# Altium PCB UPCNSL-ABS-PVC-2B.PcbDoc
Units mm, origin at the board's own origin, x right, y up, seen from the top; angles counter-clockwise.
Board outline 82 x 98.4 mm, 2 copper layers (Top Layer, Bottom Layer), stack 0.325 mm thick; 59 components, 56 nets, 164 pads, 60 vias.
Unrouted connection lines stored in the file: 6.
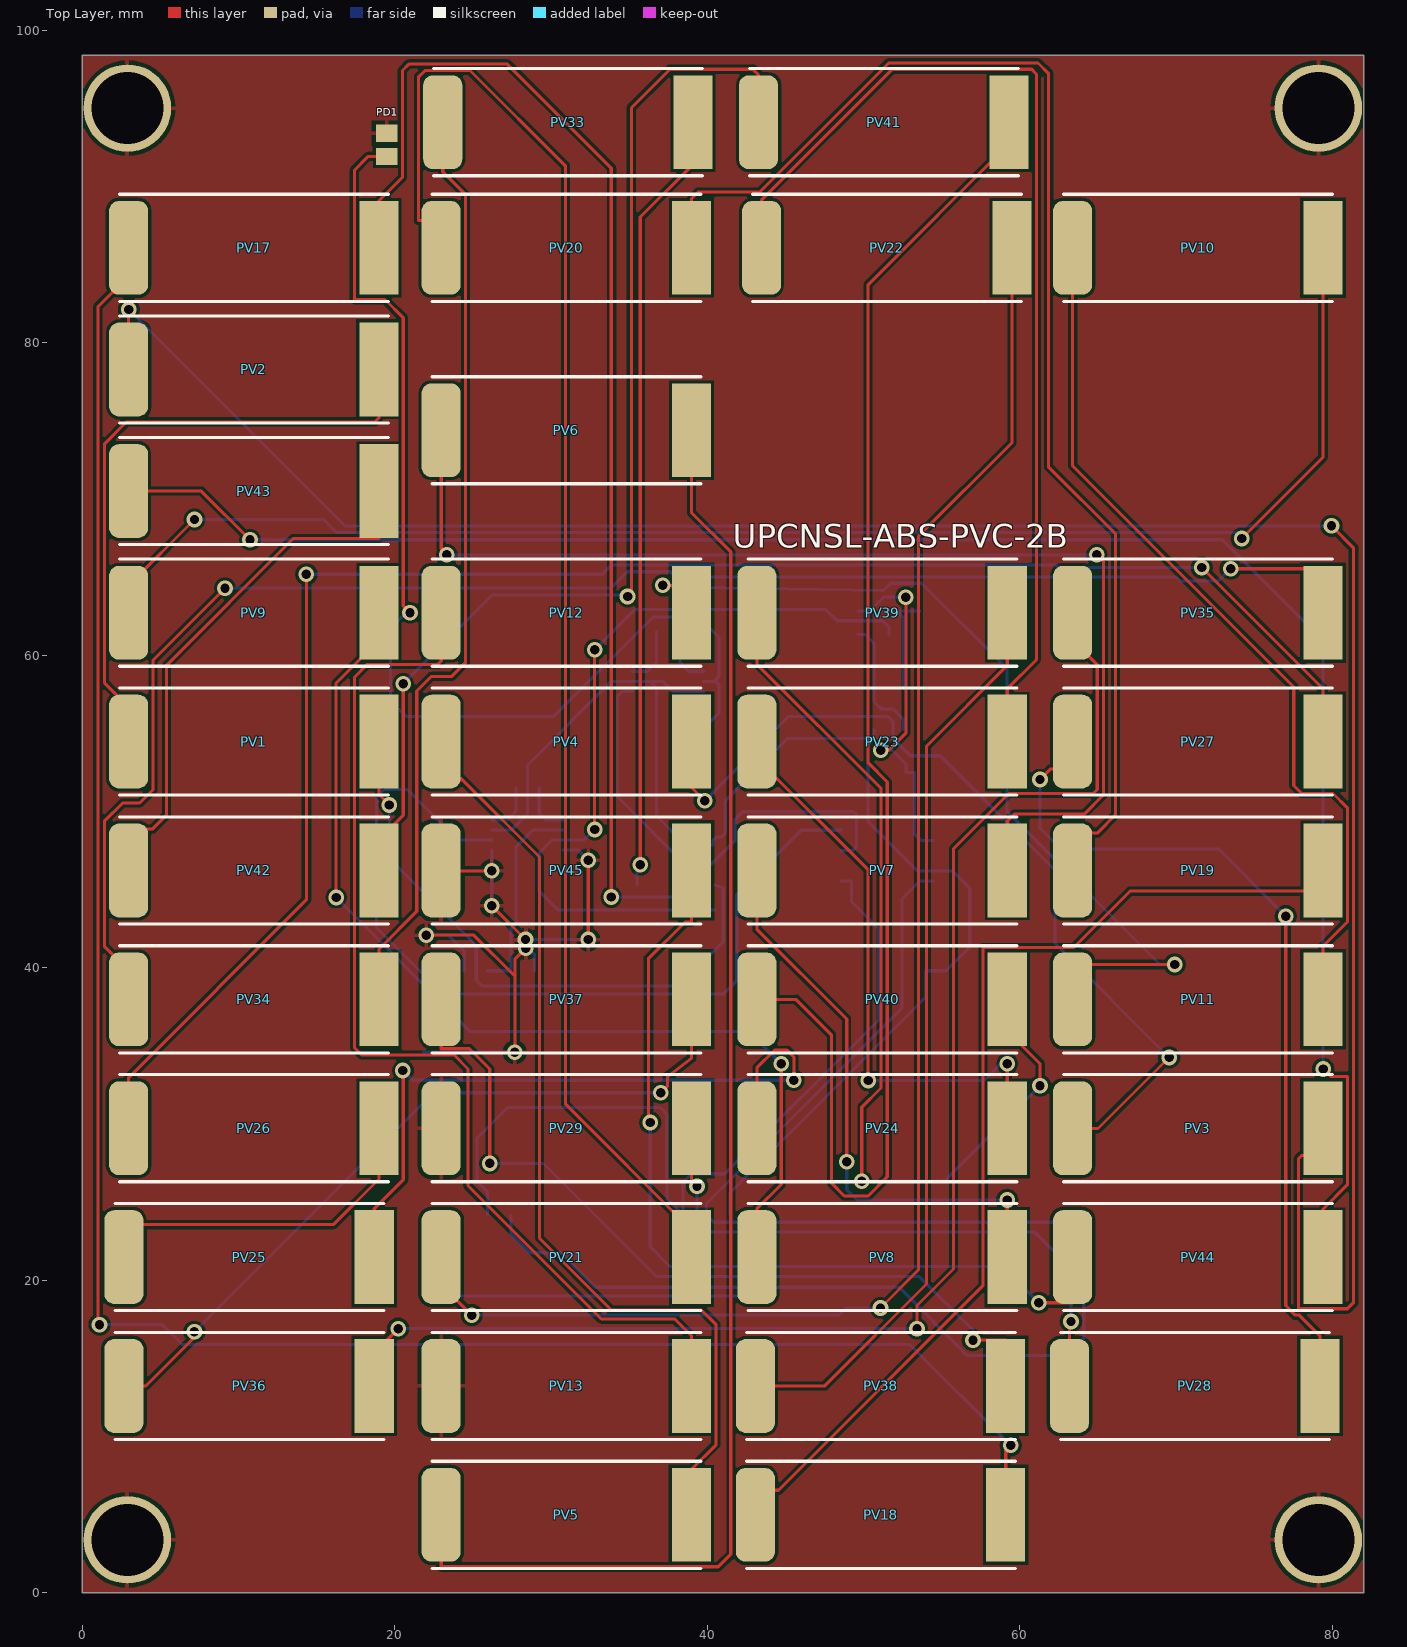
[diagram p0: Top Layer view]
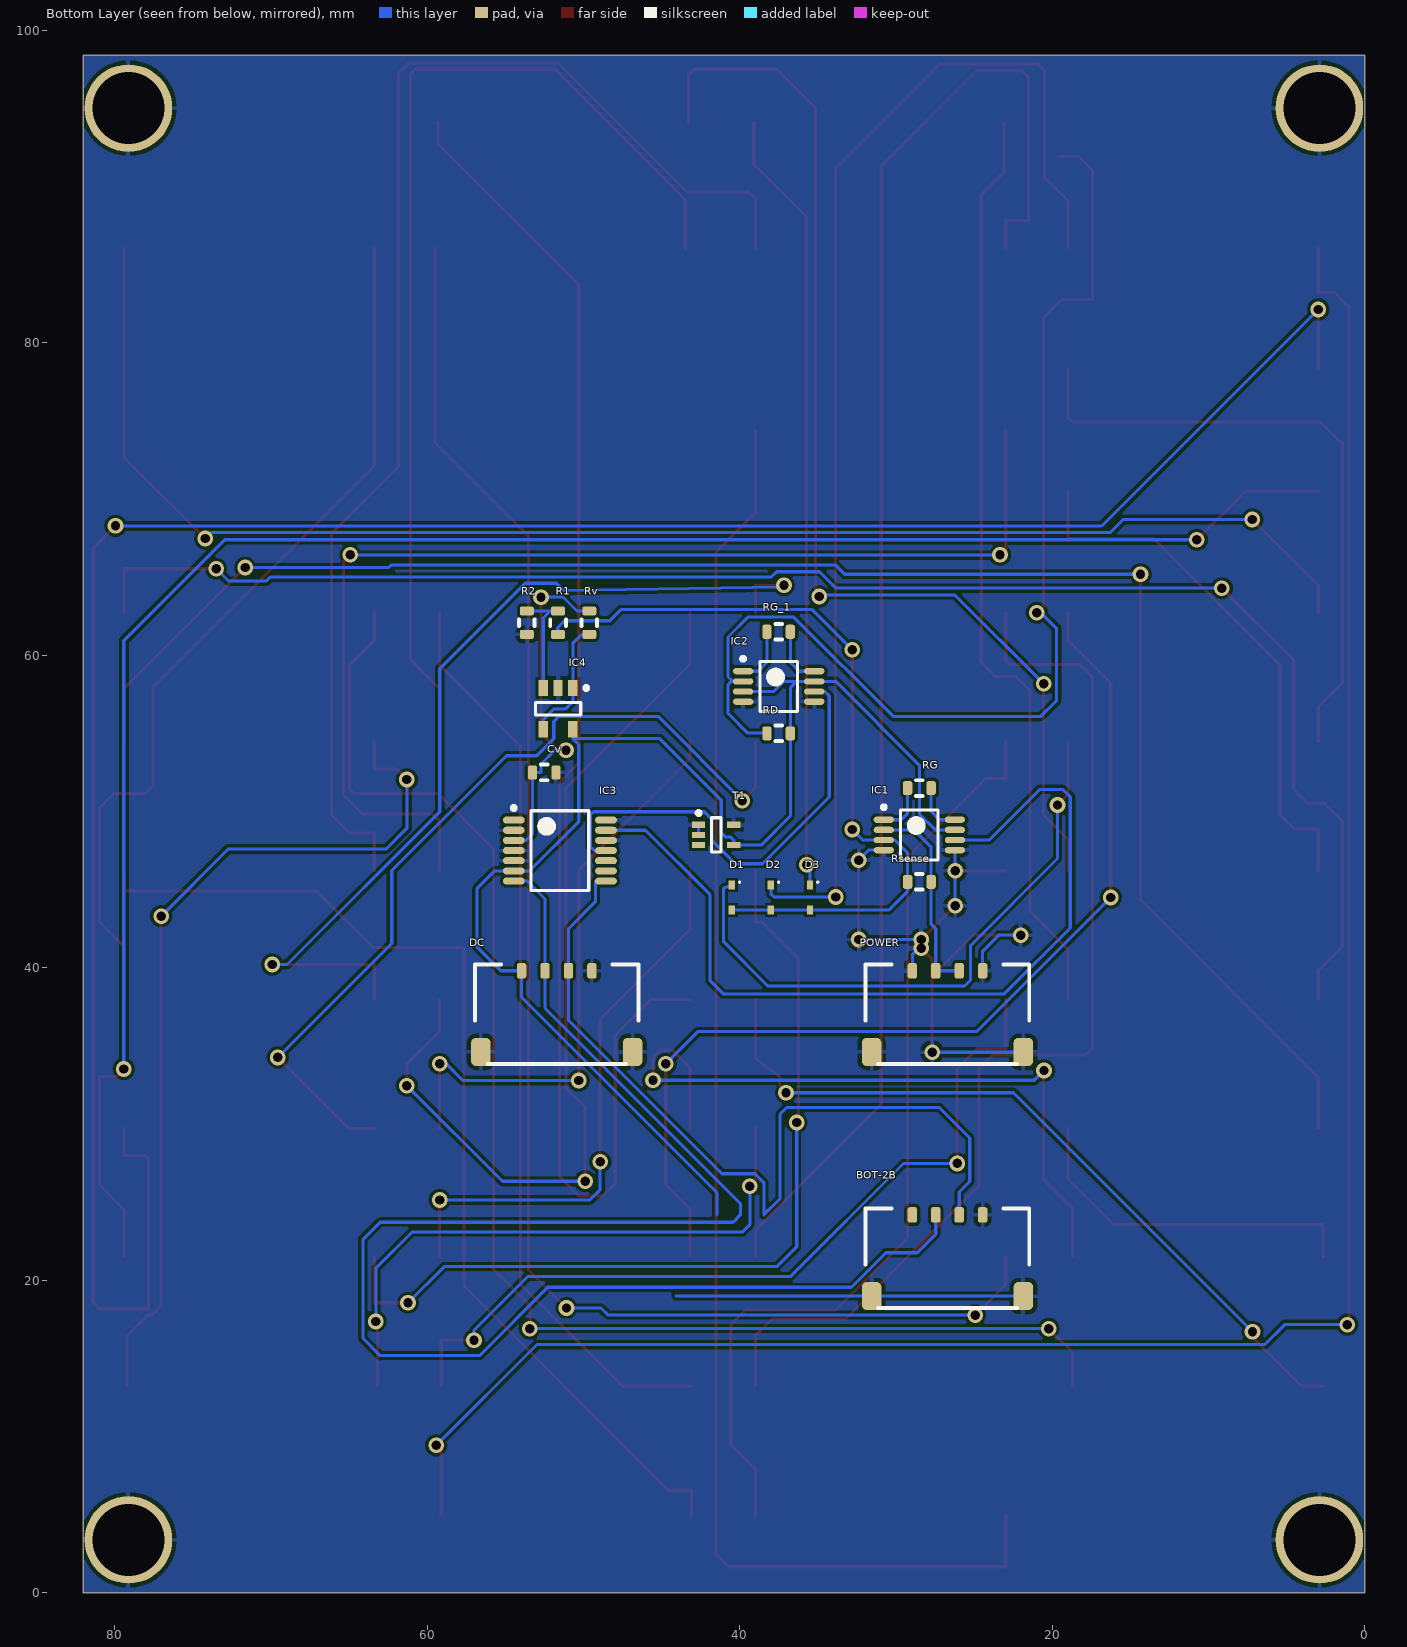
[diagram p1: Bottom Layer view, seen from below]
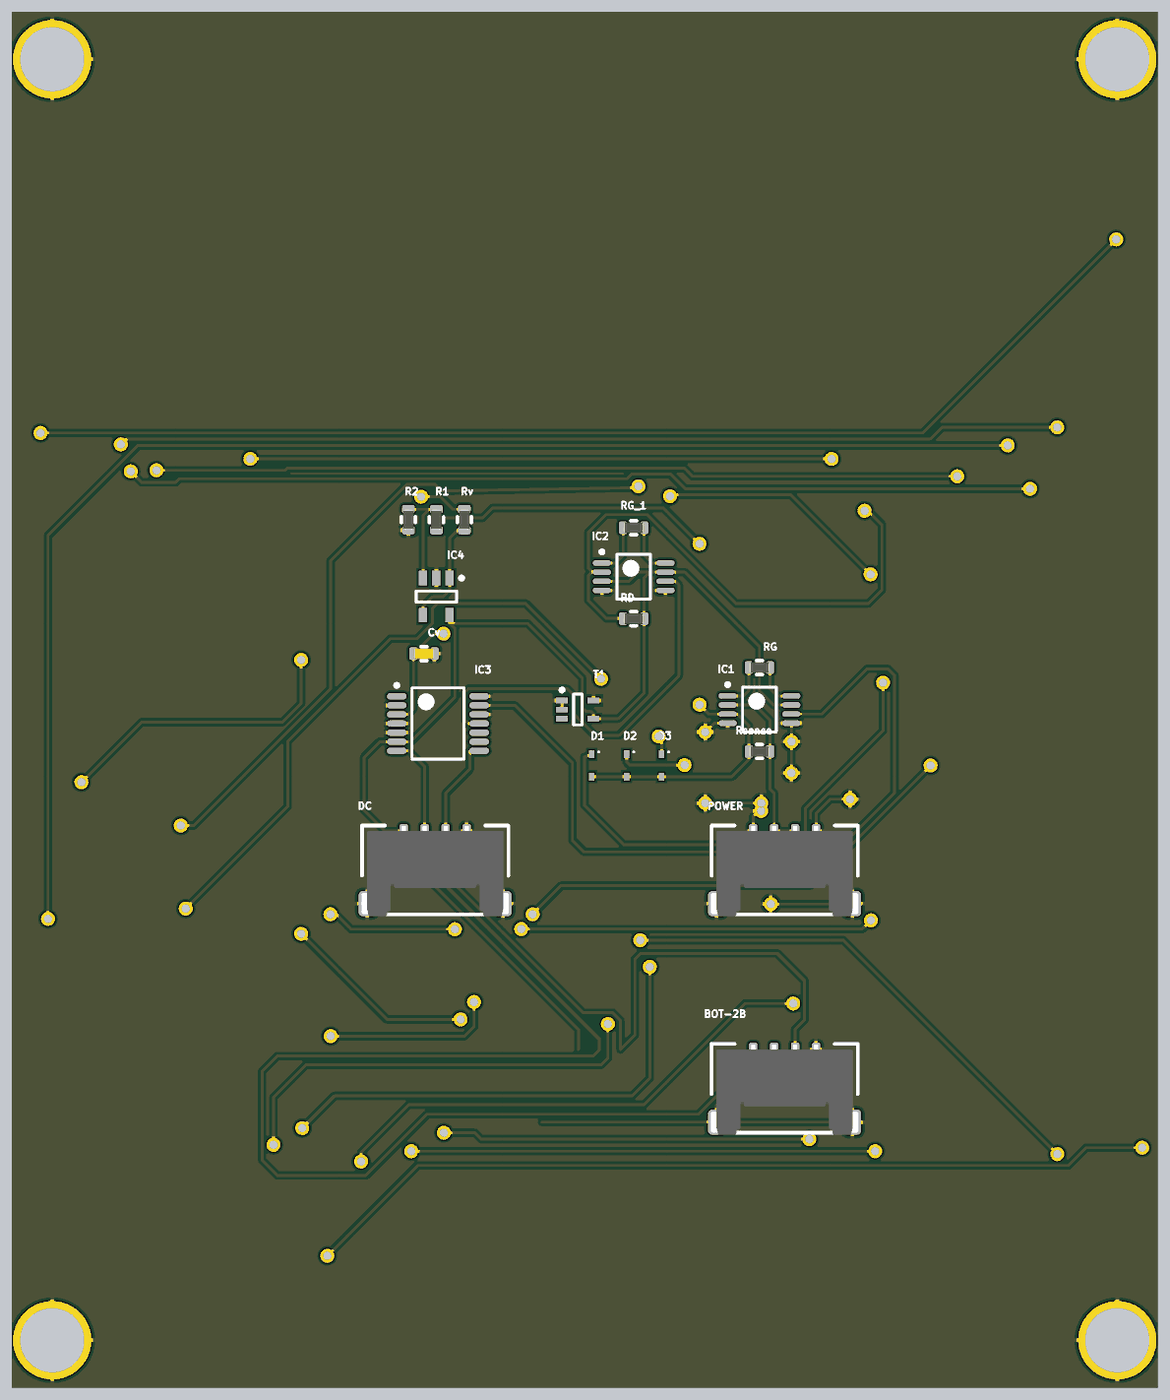
[diagram p2: 3D render of the assembled board from below, using the file's embedded part models]

## Layer stack, top to bottom
Top Solder: solder mask 0.0102, Solder Resist, Dk 3.5
Top Layer: signal copper 0.0356
Dielectric 1: core 0.254, FR-4, Dk 4.2
Bottom Layer: signal copper 0.0356
Bottom Solder: solder mask 0.0102, Solder Resist, Dk 3.5

## Board outline
0,0 82,0 82,98.4 0,98.4

## Design rules (kind name [scope] priority, off if disabled: settings)
Clearance [All] p1: gap=0.2
PolygonConnect [All] p1: connectstyle=Relief reliefconductorwidth=0.256 reliefentries=4 polygonreliefangle="90 Angle" airgapwidth=0.256
RoutingVias [All] p1: holewidth=0.6 width=1 viastyle="Through Hole" minholewidth=0.711 minwidth=1.27 maxholewidth=0.711 maxwidth=1.27
SolderMaskExpansion [All] p1: expansion=0.102
UnpouredPolygon [All] p1: allowunpoured=FALSE
Width [All] p1: maxlimit=1 minlimit=0.2 preferedwidth=0.2
29 further rules are at their usual default settings.

## Components (designator, comment, footprint, x,y, rotation, side; value= is the part's Value field where it differs from the comment)
BOT-2B "5040500491" 5040500491 26.7,19 r180 bottom
Cv "CAP0603" CAP0603 52.5,52.5 r0 bottom
D1 "DIODE" "(Schottky diode) SODFL160X70-2N" 40.5,44.5 r270 bottom
D2 "DIODE" "(Schottky diode) SODFL160X70-2N" 38,44.5 r270 bottom
D3 "DIODE" "(Schottky diode) SODFL160X70-2N" 35.5,44.5 r270 bottom
DC "5040500491" 5040500491 51.7,34.619 r180 bottom
IC1 "AD623ARMZ" AD623ARMZ 28.5,48.5 r180 bottom
IC2 "AD623ARMZ" AD623ARMZ 37.5,58 r180 bottom
IC3 "MCP3424" MCP3424 51.5,47.5 r180 bottom
IC4 "AD8603" AD8603 51.616,56.577 r270 bottom
PD1 "Photo Sen" C0805 19.493,92.65 r270 top
POWER "5040500491" 5040500491 26.7,34.619 r180 bottom
PV1 "PVCELL" "PV CELLS" 11,54.473 r180 top
PV2 "PVCELL" "PV CELLS" 11,78.282 r180 top
PV3 "PVCELL" "PV CELLS" 71.4,29.736 r180 top
PV4 "PVCELL" "PV CELLS" 31,54.473 r180 top
PV5 "PVCELL" "PV CELLS" 31,5 r180 top
PV6 "PVCELL" "PV CELLS" 31,74.391 r180 top
PV7 "PVCELL" "PV CELLS" 51.2,46.227 r180 top
PV8 "PVCELL" "PV CELLS" 51.2,21.491 r180 top
PV9 "PVCELL" "PV CELLS" 11,62.718 r180 top
PV10 "PVCELL" "PV CELLS" 71.4,86.064 r180 top
PV11 "PVCELL" "PV CELLS" 71.4,37.982 r180 top
PV12 "PVCELL" "PV CELLS" 31,62.718 r180 top
PV13 "PVCELL" "PV CELLS" 31,13.245 r180 top
PV17 "PVCELL" "PV CELLS" 11,86.064 r180 top
PV18 "PVCELL" "PV CELLS" 51.1,5 r180 top
PV19 "PVCELL" "PV CELLS" 71.4,46.227 r180 top
PV20 "PVCELL" "PV CELLS" 31,86.064 r180 top
PV21 "PVCELL" "PV CELLS" 31,21.491 r180 top
PV22 "PVCELL" "PV CELLS" 51.5,86.064 r180 top
PV23 "PVCELL" "PV CELLS" 51.2,54.473 r180 top
PV24 "PVCELL" "PV CELLS" 51.2,29.736 r180 top
PV25 "PVCELL" "PV CELLS" 10.7,21.491 r180 top
PV26 "PVCELL" "PV CELLS" 11,29.736 r180 top
PV27 "PVCELL" "PV CELLS" 71.4,54.473 r180 top
PV28 "PVCELL" "PV CELLS" 71.2,13.245 r180 top
PV29 "PVCELL" "PV CELLS" 31,29.736 r180 top
PV33 "PVCELL" "PV CELLS" 31.1,94.1 r180 top
PV34 "PVCELL" "PV CELLS" 11,37.982 r180 top
PV35 "PVCELL" "PV CELLS" 71.4,62.718 r180 top
PV36 "PVCELL" "PV CELLS" 10.7,13.245 r180 top
PV37 "PVCELL" "PV CELLS" 31,37.982 r180 top
PV38 "PVCELL" "PV CELLS" 51.1,13.245 r180 top
PV39 "PVCELL" "PV CELLS" 51.2,62.718 r180 top
PV40 "PVCELL" "PV CELLS" 51.2,37.982 r180 top
PV41 "PVCELL" "PV CELLS" 51.3,94.1 r180 top
PV42 "PVCELL" "PV CELLS" 11,46.227 r180 top
PV43 "PVCELL" "PV CELLS" 11,70.5 r180 top
PV44 "PVCELL" "PV CELLS" 71.4,21.491 r180 top
PV45 "PVCELL" "PV CELLS" 31,46.227 r180 top
R1 "RES0603" RES0603 51.616,62.077 r270 bottom
R2 "RES0603" RES0603 53.616,62.077 r90 bottom
RD "RES0603" RES0603 37.5,55 r180 bottom
RG "RES0603" RES0603 28.5,51.5 r180 bottom
RG_1 "RES0603" RES0603 37.5,61.5 r180 bottom
Rsense "RES0603" RES0603 28.5,45.5 r0 bottom
Rv "RES0603" RES0603 49.616,62.077 r90 bottom
T1 "LMT84 DCK" DCK/SOT65P210X110-5N 41.5,48.5 r180 bottom

## Footprints (in the part's own frame and the unit in brackets; to place one, negate y for a bottom-side part, rotate by r counter-clockwise, add the part's x,y. Pads: shape width x height; smd on the part's side, far side on the other; paste and mask are expansions set on the pad)
5040500491 [mm] "1.50mm Pitch Pico-Lock™ Surface Mount Wire-to-Board Header, Right Angle,2.00mm Mated Height, Positive Side Locks, 4 Circuits"
  rrect50% 1.25x1.8 smd: 0(-4.855,0) 0(4.855,0)
  rrect50% 0.6x1 smd: 1(-2.25,5.19) 2(-0.75,5.19) 3(0.75,5.19) 4(2.25,5.19)
  silkscreen extent -5.23,-0.76 5.23,5.59, body extent -5.27,-0.9 5.28,5.54, height 1.98
"(Schottky diode) SODFL160X70-2N" [mm] "SODFL, 2-Leads, Body 0,80x1,60mm, IPC Medium Density"
  rect 0.55x0.4 smd: A(-0.8,0) K(0.8,0)
  silkscreen extent -1.02,0.45 -0.93,0.55, body extent -0.65,-0.45 0.65,0.45, height 0.7
AD623ARMZ [mm] "Single-Supply, Rail-to-Rail, Instrumentation Amplifier"
  oval 1.3x0.4 smd: 1(-2.275,0.975) 2(-2.275,0.325) 3(-2.275,-0.325) 4(-2.275,-0.975) 5(2.275,-0.975) 6(2.275,-0.325) 7(2.275,0.325) 8(2.275,0.975)
  silkscreen extent -2.4,-1.6 1.2,1.9, body extent -1.6,-1.6 1.6,1.6, height 1.1
AD8603 [mm] "SOT23, 5-Leads, Body 2,90x2,80mm, Pitch 0,95mm, IPC Medium Density"
  rect 1.05x0.6 smd: 1(-1.325,0.95) 2(-1.325,0) 3(-1.325,-0.95) 4(1.325,-0.95) 5(1.325,0.95)
  silkscreen extent -1.45,-1.45 0.4,1.92, body extent -0.8,-1.45 0.8,1.45, height 1
C0805 [mm] "Chip Capacitor, Body 2.0x1.3mm, IPC High Density"
  rect 1.1x1.4 smd: 1(-0.75,0) 2(0.75,0)
  body extent -1.1,-0.72 1.1,0.72, height 1.4
CAP0603 [mm] "Capacitor Chip Inductor, Body 0.6x0.3mm, IPC High Density"
  rrect50% 0.6x0.9 smd: 1(-0.75,0) 2(0.75,0)
  silkscreen extent -0.2,-0.5 0.2,0.5, body extent -0.76,-0.38 0.76,0.38, height 0.76
DCK/SOT65P210X110-5N [mm] "SOT23, 5-Leads, Body 2,00x2,10mm, Pitch 0,65mm, IPC Medium Density"
  rect 0.85x0.4 smd: 1(-1.125,0.65) 2(-1.125,0) 3(-1.125,-0.65) 4(1.125,-0.65) 5(1.125,0.65)
  silkscreen extent -1.25,-1.1 0.3,1.52, body extent -0.7,-1.07 0.7,1.08, height 1.1
MCP3424 [mm] "18-Bit, Multi-Channel ?S Analog-to-Digital Converter with  I2C"
  oval 1.4x0.45 smd: 1(-2.95,1.95) 2(-2.95,1.3) 3(-2.95,0.65) 4(-2.95,0) 5(-2.95,-0.65) 6(-2.95,-1.3) 7(-2.95,-1.95) 8(2.95,-1.95) 9(2.95,-1.3) 10(2.95,-0.65) 11(2.95,0) 12(2.95,0.65) 13(2.95,1.3) 14(2.95,1.95)
  silkscreen extent -3.08,-2.55 1.85,2.85, body extent -2.25,-2.55 2.25,2.55, height 1.2
"PV CELLS" [mm] "IXYS KXOB22-12X1L-ND"
  rect 2.5x6 smd: 1(-7.993,0)
  rrect50% 2.5x6 smd: 2(8.025,0)
  silkscreen extent -8.6,-3.43 8.6,3.43, body extent -8.97,-3.5 9.03,3.5, height 1.8
RES0603 [mm] "Resistor Chip Inductor, Body 0.6x0.3mm, IPC High Density"
  rrect50% 0.6x0.9 smd: 1(-0.75,0) 2(0.75,0)
  silkscreen extent -0.2,-0.5 0.2,0.5, body extent -0.76,-0.38 0.76,0.38, height 0.76

## Part data
BOT-2B DC POWER: library part MOLEX_5040500491, "1.50mm Pitch Pico-Lock™ Surface Mount Wire-to-Board Header, Right Angle,2.00mm Mated Height, Positive Side Locks, 4 Circuits"
Cv: "Capacitor"
IC3: "18-Bit, Multi-Channel ?S Analog-to-Digital Converter with  I2C"
PD1: "Photosensitive Diode"
PV1 PV2 PV3 PV4 PV5 PV6 PV7 PV8 PV9 PV10 PV11 PV12 PV13 PV17 PV18 PV19 PV20 PV21 PV22 PV23 PV24 PV25 PV26 PV27 PV28 PV29 PV33 PV34 PV35 PV36 PV37 PV38 PV39 PV40 PV41 PV42 PV43 PV44 PV45: library part PVCELLS, "IXYS KXOB22-12X1L-ND"
R1 R2 RD RG RG_1 Rsense Rv: "Resistor"

## Free pads (board coordinates)
  round 5.6 hole 4.6: 0(2.9,95) 1(79.1,95) 2(79.1,3.4) 3(2.9,3.4)

## Via types
v1: diameter 1, hole 0.6, Top Layer to Bottom Layer, 60 vias

## Nets (pads, with @x,y where several pads share a name; then routed paths per layer and width w, separated by ;. In a path a pad name is that pad's centre, name@x,y a point inside that pad or via, vN(x,y) a via of type N, cw(c..) or ccw(c..) an arc to the next point about the centre after c; other vN are vias at no path point)
5V: BOT-2B.1 DC.1 IC1.7 IC2.3 IC2.7 IC3.6 IC4.5 RD.2 T1.4 | length 89.6
  Bottom Layer w0.2: IC1.7 27.483,48.825 28.499,49.841 28.499,52.966 33.858,58.325 IC2.7 36.337,58.325 ; IC2.3 37.81,57.675 37.16,58.325 36.337,58.325 ; 41.45,24.19 41.45,25.603 53.95,38.103 DC.1 55.277,39.809 56.794,41.326 56.794,45.082 55.677,46.2 IC3.6 53.442,46.2 50.292,49.349 50.292,54.287 50.666,54.661 ; IC4.5 50.666,54.661 ; 36.337,58.325 36.75,57.912 RD.2 36.75,49.708 38.608,47.85 T1.4 40.375,48.158 40.578,48.362 40.894,48.362 41.173,48.641 41.173,50.724 45.11,54.661 50.666,54.661
GND: BOT-2B.0 BOT-2B.4 Cv.1 DC.0 DC.4 IC1.4 IC1.5 IC2.4 IC2.5 IC3.2 IC3.4 IC3.5 IC3.12 IC3.14 IC4.2 pad.0 pad.1 pad.2 pad.3 PD1.1 POWER.0 POWER.1 POWER.4 PV13.2 PV29.2 PV45.2 R2.1 T1.1 T1.2 T1.5 | length 77.5
  Top Layer w0.2: v1(22.022,42.088) 25.07,42.088 27.686,39.472 ; PV45.2 22.975,46.203 v1(26.213,46.203) ; v1(26.213,43.967) v1(28.372,41.808) ; v1(27.686,34.595) 27.686,39.472 ; v1(28.382,41.25) 27.686,40.554 27.686,39.472 ; v1(32.385,41.808) v1(32.385,46.89)
  Bottom Layer w0.2: BOT-2B.0@21.845,18.999 31.555,18.999 33.858,18.999 42.215,18.999 ; POWER.0@21.845,34.619 21.845,34.595 v1(27.686,34.595) ; v1(22.022,42.088) 23.43,42.088 24.45,41.068 POWER.4 ; v1(26.213,43.967) v1(26.213,46.203) 26.213,47.525 IC1.5 ; v1(28.372,41.808) v1(32.385,41.808) ; v1(28.382,41.25) 28.544,41.25 28.95,40.843 POWER.1 ; IC1.4 31.75,47.525 v1(32.385,46.89) ; 33.859,19 34.345,19 44.055,19 ; T1.2 T1.1
IRR: IC2.6 IC3.11 | length 30
  Bottom Layer w0.2: IC2.6 34.544,57.675 34.265,57.396 34.265,50.927 38.532,46.66 40.284,46.66 41.783,48.158 41.783,49.505 42.266,49.987 49.352,49.987 49.555,49.784 49.555,47.752 49.303,47.5 IC3.11
ISENSE: IC1.6 IC3.13 | length 56.3
  Bottom Layer w0.2: IC1.6 24.028,48.175 20.794,51.41 19.321,51.41 18.847,50.936 18.847,42.545 23.063,38.329 41.046,38.329 41.885,39.167 41.885,44.666 46.018,48.8 IC3.13
NetIC1_1: IC1.1 RG.1 | length 3.3
  Bottom Layer w0.2: RG.1 29.25,49.892 29.667,49.475 IC1.1
NetIC1_8: IC1.8 RG.2 | length 3.2
  Bottom Layer w0.2: IC1.8 27.229,49.475 27.75,49.996 RG.2
NetIC2_1: IC2.1 RG_1.1 | length 3.7
  Bottom Layer w0.2: RG_1.1 38.25,59.538 38.813,58.975 IC2.1
NetIC2_2: IC2.2 PD1.2 RD.1 | length 73.1
  Top Layer w0.2: PD1.2 18.288,91.9 17.424,91.036 17.424,82.753 19.38,82.753 20.549,81.585 20.549,63.144 v1(20.98,62.713)
  Bottom Layer w0.2: v1(20.98,62.713) 20.726,62.713 19.736,61.722 19.736,57.074 20.726,56.083 30.177,56.083 36.527,62.433 39.472,62.433 40.742,61.163 40.742,58.63 40.437,58.325 ; RD.1 38.25,55.016 39.472,55.016 40.742,56.286 40.742,58.115 40.532,58.325 40.437,58.325 ; IC2.2 40.437,58.325
NetIC2_8: IC2.8 RG_1.2 | length 3.7
  Bottom Layer w0.2: IC2.8 36.187,58.975 36.75,59.538 RG_1.2
NetPV1_2: PV1.2 PV2.1 | length 41
  Top Layer w0.2: PV1.2 2.975,56.689 1.422,58.242 1.422,73.508 2.845,74.93 18.739,74.93 18.993,75.184 PV2.1
NetPV2_2: PV2.2 PV3.1 | length 153.5
  Top Layer w0.2: PV2.2 v1(2.975,82.118) ; PV3.1 79.393,27.991 78.029,27.991 77.826,27.788 77.826,18.186 80.95,18.186 81.356,18.593 81.356,66.853 v1(79.934,68.275)
  Bottom Layer w0.2: v1(2.975,82.118) 16.818,68.275 v1(79.934,68.275)
NetPV3_2: PV3.2 PV4.1 | length 56.6
  Top Layer w0.2: PV4.1 38.993,51.537 v1(39.831,50.698) ; PV3.2 63.375,29.718 64.999,29.718 v1(69.545,34.265)
  Bottom Layer w0.2: v1(39.831,50.698) 45.216,56.083 51.562,56.083 51.892,55.753 51.892,54.661 52.984,53.569 54.915,53.569 62.255,46.228 62.255,41.554 v1(69.545,34.265)
NetPV4_2: PV4.2 PV5.1 | length 61.5
  Top Layer w0.2: PV4.2 22.975,52.121 24.232,52.121 29.261,47.092 29.261,22.708 33.858,18.11 39.624,18.11 40.564,17.17 40.564,9.495 38.993,7.925 PV5.1
NetPV5_2: PV5.2 PV6.1 | length 95.1
  Top Layer w0.2: PV5.2 22.975,1.676 40.691,1.676 41.504,2.489 41.504,66.607 38.993,69.118 PV6.1
NetPV6_2: PV6.2 PV7.1 | length 75.2
  Top Layer w0.2: PV6.2 22.975,66.788 v1(23.343,66.421) ; PV7.1 59.193,49.378 59.65,49.835 64.11,49.835 65.354,51.079 65.354,65.989 v1(64.922,66.421)
  Bottom Layer w0.2: v1(23.343,66.421) v1(64.922,66.421)
NetPV7_2: PV7.2 PV8.1 | length 37
  Top Layer w0.2: PV7.2 43.175,42.469 48.92,36.724 v1(48.92,27.584) ; v1(59.182,25.146) 59.193,25.135 PV8.1
  Bottom Layer w0.2: v1(48.92,27.584) 48.92,25.806 49.581,25.146 v1(59.182,25.146)
NetPV9_2: PV9.2 PV10.1 | length 96
  Top Layer w0.2: PV9.2 2.975,64.465 v1(7.192,68.682) ; v1(74.193,67.462) 79.393,72.662 PV10.1
  Bottom Layer w0.2: v1(7.192,68.682) 15.46,68.682 16.299,67.843 73.812,67.843 v1(74.193,67.462)
NetPV10_2: PV10.2 PV11.1 | length 57.2
  Top Layer w0.2: PV10.2 63.375,72.108 77.521,57.963 77.521,51.664 78.029,51.156 80.035,51.156 80.95,50.241 80.95,42.926 79.393,41.369 PV11.1
NetPV11_2: PV11.2 PV12.1 | length 60.8
  Top Layer w0.2: v1(37.16,64.465) 38.993,64.465 PV12.1 ; PV11.2 63.375,40.208 v1(69.901,40.208)
  Bottom Layer w0.2: v1(37.16,64.465) 37.16,64.364 51.258,64.135 51.727,64.605 53.708,64.605 59.182,59.131 59.182,49.987 68.961,40.208 v1(69.901,40.208)
NetPV12_2: PV12.2 PV13.1 | length 69.6
  Top Layer w0.2: PV12.2 22.975,59.627 22.758,59.411 18.237,59.411 17.424,58.598 17.424,34.874 17.882,34.417 23.8,34.417 24.689,33.528 24.689,26.06 33.223,17.526 37.926,17.526 38.993,16.459 PV13.1
NetPV17_2: PV17.2 PV18.1 | length 136.4
  Top Layer w0.2: v1(1.118,17.17) 1.016,17.272 1.016,82.296 1.927,83.207 2.975,83.207 PV17.2 ; PV18.1 59.093,9.119 v1(59.417,9.443)
  Bottom Layer w0.2: v1(1.118,17.17) 5.131,17.17 6.401,15.9 52.959,15.9 v1(59.417,9.443)
NetPV18_2: PV18.2 PV19.1 | length 67.8
  Top Layer w0.2: PV18.2 43.075,6.575 44.559,6.575 57.633,19.649 57.633,41.3 63.437,41.3 67.043,44.907 79.393,44.907 PV19.1
NetPV19_2: PV19.2 PV20.1 | length 84.7
  Top Layer w0.2: PV20.1 38.993,89.209 39.421,89.637 43.358,89.637 51.613,97.892 61.163,97.892 61.824,97.231 61.824,72.06 66.116,67.767 66.116,49.784 64.948,48.616 63.375,48.616 PV19.2
NetPV20_2: PV20.2 PV21.1 | length 97.6
  Top Layer w0.2: PV20.2 22.975,87.808 21.514,87.808 21.514,96.977 21.946,97.409 24.816,97.409 30.937,91.288 30.937,31.272 38.993,23.216 PV21.1
NetPV21_2: PV21.2 PV22.1 | length 102.2
  Top Layer w0.2: PV21.2 22.975,19.736 v1(24.931,17.78) ; v1(51.079,18.237) 53.505,20.663 53.505,67.602 59.493,73.59 PV22.1
  Bottom Layer w0.2: v1(24.931,17.78) 48.412,17.78 48.87,18.237 v1(51.079,18.237)
NetPV22_2: PV22.2 PV23.1 | length 67.7
  Top Layer w0.2: PV22.2 43.475,89.129 51.832,97.485 60.757,97.485 61.062,97.18 61.062,59.715 59.193,57.847 PV23.1
NetPV23_2: PV23.2 PV24.1 | length 38.1
  Top Layer w0.2: PV23.2 43.175,53.391 50.292,46.274 v1(50.292,32.791) ; PV24.1 v1(59.193,33.858)
  Bottom Layer w0.2: v1(50.292,32.791) 57.709,32.791 58.776,33.858 v1(59.193,33.858)
NetPV25_2: PV25.2 PV26.1 | length 22.9
  Top Layer w0.2: PV25.2 2.675,23.571 16.078,23.571 18.993,26.486 PV26.1
NetPV26_2: PV26.2 PV27.1 | length 112.1
  Top Layer w0.2: PV26.2 2.975,32.969 14.351,44.345 v1(14.351,65.176) ; v1(71.639,65.608) 79.393,57.854 PV27.1
  Bottom Layer w0.2: v1(14.351,65.176) 33.274,65.176 33.858,65.761 62.306,65.761 62.459,65.608 v1(71.639,65.608)
NetPV27_2: PV27.2 PV28.1 | length 56.4
  Top Layer w0.2: v1(61.29,52.045) 61.976,52.73 63.375,52.73 PV27.2 ; v1(77.013,43.307) 77.013,18.39 77.622,17.78 77.872,17.78 79.193,16.459 PV28.1
  Bottom Layer w0.2: v1(61.29,52.045) 61.29,48.924 62.615,47.6 72.72,47.6 v1(77.013,43.307)
NetPV28_2: PV28.2 PV29.1 | length 39
  Top Layer w0.2: PV29.1 38.993,26.365 v1(39.345,26.014) ; PV28.2 63.175,17.277 v1(63.271,17.374)
  Bottom Layer w0.2: v1(39.345,26.014) 39.345,23.571 39.827,23.089 60.96,23.089 63.271,20.777 v1(63.271,17.374)
NetPV33_2: PV33.2 PV34.1 | length 59.8
  Top Layer w0.2: PV34.1 18.993,41.193 21.412,43.612 21.412,57.709 22.352,58.649 23.647,58.649 24.536,59.538 24.536,89.459 23.075,90.92 PV33.2
NetPV34_2: PV34.2 PV35.1 | length 104.9
  Top Layer w0.2: PV34.2 2.975,39.824 1.422,41.377 1.422,49.378 2.591,50.546 3.683,50.546 4.547,51.41 4.547,59.69 v1(9.144,64.287) ; v1(73.482,65.532) 79.393,65.532 PV35.1
  Bottom Layer w0.2: v1(9.144,64.287) 33.834,64.287 34.888,65.341 37.63,65.341 37.967,65.005 70.019,65.005 70.276,64.749 72.699,64.749 v1(73.482,65.532)
NetPV35_2: PV35.2 PV36.1 | length 91.9
  Top Layer w0.2: PV36.1 18.693,15.391 v1(20.218,16.916) ; v1(53.416,16.916) 53.416,18.39 55.753,20.726 55.753,47.625 59.284,51.156 64.694,51.156 64.948,51.41 64.948,59.387 63.375,60.96 PV35.2
  Bottom Layer w0.2: v1(20.218,16.916) v1(53.416,16.916)
NetPV36_2: PV36.2 PV37.1 | length 49.2
  Top Layer w0.2: PV36.2 4.064,13.245 7.188,16.37 v1(7.188,16.713) ; v1(37.033,32.004) 37.443,32.414 37.443,33.036 38.993,34.218 PV37.1
  Bottom Layer w0.2: v1(7.188,16.713) 22.479,32.004 v1(37.033,32.004)
NetPV37_2: PV37.2 PV38.1 | length 53.8
  Top Layer w0.2: PV37.2 22.975,34.823 24.79,34.823 26.086,33.528 v1(26.086,27.483) ; v1(56.998,16.18) 59.093,16.18 PV38.1
  Bottom Layer w0.2: v1(26.086,27.483) 29.517,27.483 36.756,20.244 53.569,20.244 56.998,16.815 v1(56.998,16.18)
NetPV38_2: PV38.2 PV39.1 | length 58.8
  Top Layer w0.2: PV38.2 43.075,13.233 47.486,13.233 54.026,19.773 54.026,54.178 59.193,59.346 PV39.1
NetPV39_2: PV39.2 PV40.1 | length 60.5
  Top Layer w0.2: PV39.2 43.175,59.43 51.117,51.488 51.117,32.309 49.886,31.077 v1(49.886,26.34) ; PV40.1 59.193,35.955 61.29,33.858 v1(61.29,32.461)
  Bottom Layer w0.2: v1(49.886,26.34) 55.169,26.34 v1(61.29,32.461)
NetPV41_2: PV41.2 PV42.1 | length 73
  Top Layer w0.2: PV42.1 18.993,48.209 20.549,49.765 v1(20.549,58.166) ; v1(34.9,63.754) 35.154,64.008 35.154,95.021 37.617,97.485 42.919,97.485 43.275,97.13 PV41.2
  Bottom Layer w0.2: v1(20.549,58.166) 26.238,63.856 34.798,63.856 v1(34.9,63.754)
NetPV42_2: PV42.2 PV43.1 | length 35
  Top Layer w0.2: PV42.2 2.975,48.87 4.496,48.87 5.41,49.784 5.41,59.361 13.511,67.462 18.993,67.462 PV43.1
NetPV43_2: PV43.2 PV44.1 | length 121.7
  Top Layer w0.2: PV43.2 7.63,70.5 v1(10.744,67.386) ; PV44.1 79.393,24.562 80.95,26.118 80.95,33.045 79.883,33.045 v1(79.4,33.528)
  Bottom Layer w0.2: v1(10.744,67.386) 72.949,67.386 79.4,60.935 v1(79.4,33.528)
NetPV44_2: PV44.2 PV45.1 | length 56.9
  Top Layer w0.2: v1(36.347,30.099) 36.233,30.213 36.233,40.577 38.583,42.926 38.993,42.926 PV45.1 ; v1(61.214,18.567) 63.375,18.567 PV44.2
  Bottom Layer w0.2: v1(36.347,30.099) 36.347,22.149 37.617,20.879 58.903,20.879 v1(61.214,18.567)
PV9: PV8.2 PV9.1 | length 65.2
  Top Layer w0.2: v1(16.256,44.501) 16.256,58.223 18.993,60.96 PV9.1 ; PV8.2 43.175,24.582 44.729,26.137 v1(44.729,33.858)
  Bottom Layer w0.2: v1(16.256,44.501) 24.841,35.916 42.672,35.916 v1(44.729,33.858)
PV25: PV24.2 PV25.1 | length 46.4
  Top Layer w0.2: PV25.1 18.693,24.587 20.549,26.443 20.549,33.401 v1(20.523,33.426) ; PV24.2 43.175,33.599 44.298,34.722 45.11,34.722 45.542,34.29 v1(45.542,32.804)
  Bottom Layer w0.2: v1(20.523,33.426) 21.146,32.804 v1(45.542,32.804)
PV41: PV40.2 PV41.1 | length 91.3
  Top Layer w0.2: PV40.2 45.66,37.982 47.955,35.687 47.955,26.213 48.768,25.4 50.292,25.4 51.517,26.625 51.517,51.888 50.292,53.113 50.292,83.709 59.293,92.71 PV41.1
SCL: BOT-2B.3 DC.3 IC3.8 | length 54.4
  Bottom Layer w0.2: BOT-2B.3 25.95,25.654 25.273,26.331 25.273,29.108 27.229,31.064 36.982,31.064 37.414,30.632 37.414,25.226 38.45,24.19 38.45,26.258 39.014,26.822 41.123,26.822 50.95,36.65 DC.3 50.95,42.493 49.225,44.218 49.225,45.55 IC3.8
SDA: BOT-2B.2 DC.2 IC3.7 | length 100.5
  Bottom Layer w0.2: BOT-2B.2 27.45,22.962 28.644,21.768 30.632,21.768 32.842,19.558 52.273,19.558 56.642,15.189 62.992,15.189 64.084,16.281 64.084,22.631 62.992,23.724 40.416,23.724 39.95,24.19 39.95,24.917 52.45,37.417 DC.2 52.45,44.406 53.594,45.55 IC3.7
TEMP: IC3.1
VCC: D1.K D2.K D3.K IC1.3 R1.2 Rsense.2 | length 50.7
  Top Layer w0.2: v1(32.791,48.844) v1(32.791,60.35)
  Bottom Layer w0.2: v1(32.791,48.844) 32.122,48.175 IC1.3 30.079,48.175 29.25,47.346 Rsense.2 29.25,44.907 30.469,43.688 35.5,43.688 D3.K 36.728,43.7 D2.K 39.243,43.7 D1.K ; v1(32.791,60.35) 35.357,62.916 47.6,62.916 48.311,62.205 51.206,62.205 51.638,61.773 51.638,61.327 R1.2
VCC_1: D1.A PV1.1 | length 39
  Top Layer w0.2: PV1.1 18.993,51.085 v1(19.66,50.419)
  Bottom Layer w0.2: v1(19.66,50.419) 19.66,46.99 25.222,41.427 25.222,39.218 25.603,38.837 38.202,38.837 41.021,41.656 41.021,45.11 D1.A
VCC_2: D2.A PV17.1 | length 79.7
  Top Layer w0.2: PV17.1 18.993,89.072 20.498,90.576 20.498,97.409 20.904,97.815 27.203,97.815 33.858,91.161 v1(33.858,44.526)
  Bottom Layer w0.2: v1(33.858,44.526) 37.795,44.526 38,44.731 D2.A
VCC_3: D3.A PV33.1 | length 50.3
  Top Layer w0.2: v1(35.712,46.584) 35.712,88.034 39.093,91.415 PV33.1
  Bottom Layer w0.2: D3.A 35.5,46.371 v1(35.712,46.584)
VD: IC4.1 IC4.4 Rv.1 | length 8
  Bottom Layer w0.2: Rv.1 50.096,61.327 50.666,60.757 IC4.1 50.666,57.03 51.13,56.566 51.88,56.566 52.566,55.88 IC4.4
VDD: IC1.2 POWER.2 POWER.3 Rsense.1 | length 13
  Bottom Layer w0.2: POWER.3 POWER.2 27.45,42.494 27.75,42.794 Rsense.1 27.75,47.721 28.854,48.825 IC1.2
VDIV: IC4.3 R1.1 R2.2 | length 7.1
  Bottom Layer w0.2: R1.1 52.121,62.827 ; IC4.3 52.566,62.382 52.121,62.827 ; R2.2 52.121,62.827
VOLT: Cv.2 IC3.3 Rv.2 | length 22.6
  Top Layer w0.2: v1(51.105,53.924) 51.613,53.924 52.705,55.016 v1(52.705,63.719)
  Bottom Layer w0.2: Rv.2 50.406,62.827 51.298,63.719 v1(52.705,63.719) ; v1(51.105,53.924) 51.816,53.924 52.705,53.035 52.705,52.5 Cv.2 53.25,48.565 53.665,48.15 IC3.3
pads on no net: IC3.9 IC3.10 T1.3

## Polygon pours and split planes (outlines as drawn)
GND on Bottom Layer "Bottom" (solid, pour order 9): 0,0 0,98.4 82,98.4 82,0
GND on Top Layer "Top" (solid, pour order 13): 0,98.4 0,0 82,0 82,98.4

## Silkscreen, mask and mechanical layers (free items; w line width, h text height)
Top Overlay:
  text "UPCNSL-ABS-PVC-2B" at 41.625,66.875 h1.52
Mechanical 3:
  lines w2: -1,0 ccw(c0,0) 0,-1 ; -1,0 ccw(c0,0) 0,-1 ; -1,0 -1,98.4 ; -1,98.4 cw(c0,98.4) 0,99.4 ; -1,98.4 cw(c0,98.4) 0,99.4 ; 0,-1 82,-1 ; 0,99.4 82,99.4 ; 82,-1 ccw(c82,0) 83,0 ; 82,-1 ccw(c82,0) 83,0 ; 82,99.4 cw(c82,98.4) 83,98.4 ; 82,99.4 cw(c82,98.4) 83,98.4 ; 83,0 83,1 83,98.4